# Altium PCB LedDispBoard.PcbDoc (part 2 of 2)
Units mm, origin at the board's own origin, x right, y up, seen from the top; angles counter-clockwise.
Board outline 196.96 x 52.93 mm, 2 copper layers (Top Layer, Bottom Layer); 169 components, 103 nets, 472 pads, 117 vias.
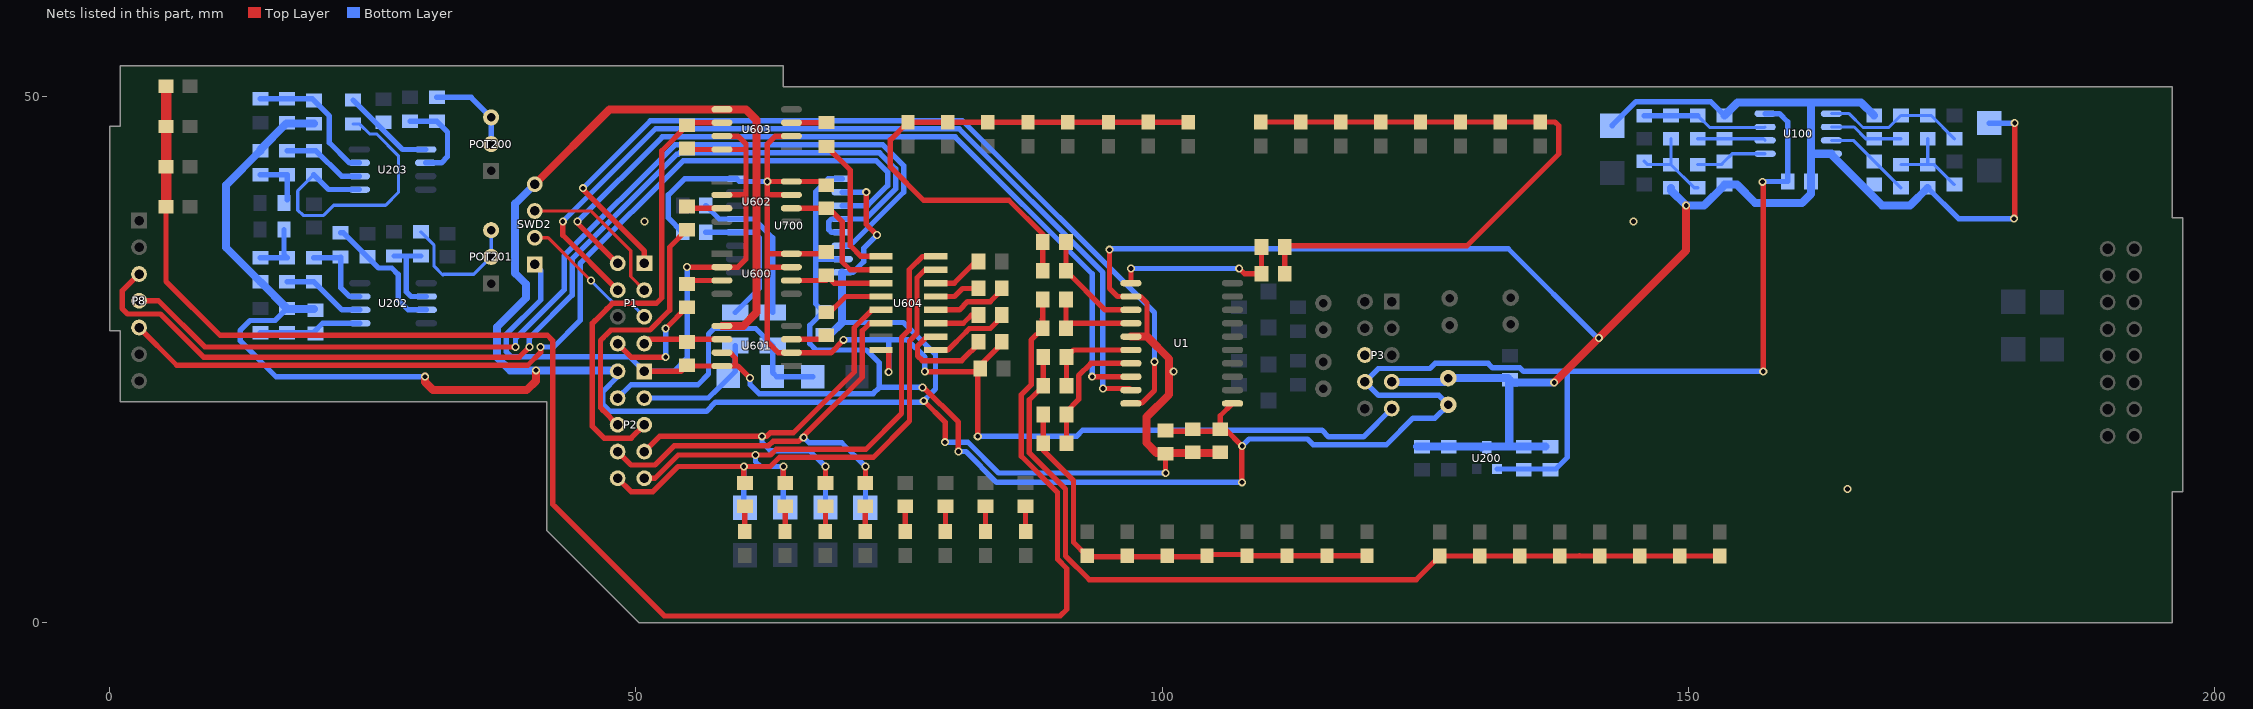
[diagram p2: the nets of this part, all layers, seen from the top]

## Via types
v1: diameter 0.762, hole 0.457, Top Layer to Bottom Layer, tented both sides, 106 vias
v2: diameter 0.8, hole 0.4, Top Layer to Bottom Layer, tented both sides, 9 vias
v3: diameter 0.762, hole 0.457, Top Layer to Bottom Layer, 2 vias

## Nets (pads, with @x,y where several pads share a name; then routed paths per layer and width w, separated by ;. In a path a pad name is that pad's centre, name@x,y a point inside that pad or via, vN(x,y) a via of type N, cw(c..) or ccw(c..) an arc to the next point about the centre after c; other vN are vias at no path point) (continued)
GNDMCU: C1.2 C2.2 C3.1 C100.1 C101.1 C104.2 C200.1 C201.2 C202.2 C203.1 C204.2 C205.2 C700.1 D100.1 D101.1 E1.2 JP1.1 P2.2 P3.7 R102.1 R103.1 R104.1 R105.1 R201.2 R203.2 R210.2 R212.2 SWD2.4 U1.12 U1.15 U100.4 U200.3 U601.5 U603.5 U700.2 U700.8 | length 465.4
  Top Layer w0.508: v1(71.882,40.894) 71.882,37.846 v1(72.898,36.83) ; v1(77.343,21.082) 79.375,19.05 v1(79.375,17.145) ; v1(94.996,35.433) 94.996,31.75 95.758,30.988 U1.12@97.028,30.988 97.917,30.988 98.552,30.353 98.552,27.178 ; C1.2@100.305,16.053 100.305,14.249 v1(100.33,14.224) ; v1(180.924,38.379) 180.99,38.445 v1(180.99,47.462)
  Top Layer w0.762: v1(29.972,23.368) 29.972,22.86 30.734,22.098 39.624,22.098 40.499,22.973 v1(40.499,23.977) ; SWD2.4@40.386,41.656 47.498,48.768 U603.5@58.17,48.768 60.452,48.768 61.468,47.752 61.468,29.464 60.198,28.194 U601.5@58.17,28.194 ; U1.15@97.028,27.178 98.552,27.178 100.66,25.07 100.66,21.692 98.501,19.533 98.501,17.094 99.466,16.129 C2.2@105.512,16.129 ; v1(137.236,22.809) 149.776,35.349 v1(149.776,39.624)
  Bottom Layer w0.508: R212.2@16.866,29.845 15.723,28.702 13.353,28.702 12.395,27.744 12.395,26.797 15.824,23.368 v1(29.972,23.368) ; P2.2@48.26,23.876 48.26,23.368 46.863,21.971 46.863,20.748 47.533,20.078 56.685,20.078 57.562,20.955 v1@77.343,20.955 ; 69.596,28.524 75.425,28.524 78.461,25.489 78.461,22.2 v1@77.584,21.323 ; U700.8@69.596,33.274 70.612,33.274 71.628,34.29 71.628,35.56 v1(72.898,36.83) ; U700.2@69.596,40.894 v1(71.882,40.894) ; v1(79.375,17.145) 81.534,17.145 84.455,14.224 v1(100.33,14.224) ; v1(94.996,35.433) 95.091,35.528 132.874,35.528 141.351,27.051 v1(141.478,27.051) ; D101.1@142.748,47.208 142.748,47.244 145.008,49.505 152.095,49.505 R105.1@153.416,48.184 ; C100.1@172.72,41.318 175.659,38.379 v1(180.924,38.379) ; D100.1@178.562,47.462 v1(180.99,47.462)
  Bottom Layer w0.762: C205.2@19.397,29.802 16.909,29.802 R212.2@16.866,29.845 R203.2@14.326,32.385 14.317,32.385 11.074,35.627 11.074,41.589 14.317,44.831 R201.2@14.326,44.831 14.326,44.958 16.781,47.414 C204.2@19.406,47.414 ; SWD2.4@40.386,41.656 38.532,39.802 38.532,33.198 39.573,32.156 39.573,30.866 36.779,28.072 36.779,25.222 38.025,23.977 38.331,23.977 v1(40.499,23.977) 47.853,23.977 48.006,24.13 48.159,23.977 P2.2@48.26,23.876 ; C700.1@68.42,27.348 69.596,28.524 U700.8@69.596,33.274 ; P3.7@121.802,22.885 126.822,22.885 E1.2@127.178,23.241 132.842,23.241 JP1.1@132.969,23.114 ; C203.1@124.206,16.721 130.353,16.721 ; 130.353,16.637 130.353,16.721 ; C201.2@136.398,16.721 132.842,16.721 ; v1(137.236,22.809) 133.274,22.809 JP1.1@133.02,23.063 JP1.1@132.969,23.114 ; C101.1@148.336,41.318 148.336,41.064 v1(149.776,39.624) 151.48,39.624 153.416,41.56 R103.1@153.416,41.622 154.593,41.622 156.337,39.878 160.782,39.878 161.628,40.724 C104.2@161.628,41.91 161.628,44.704 ; R105.1@153.416,48.184 154.661,49.428 161.417,49.428 ; U100.4@163.576,44.45 168.402,39.624 171.026,39.624 C100.1@172.72,41.318 ; U100.4@163.576,44.55 161.782,44.55 161.628,44.704 ; R104.1@167.64,48.184 166.395,49.428 161.417,49.428 ; 130.353,16.721 132.842,16.721 ; 132.842,16.721 132.969,16.848 JP1.1@132.969,23.114 ; 161.417,49.428 161.628,49.217 161.628,44.704
  other v1: 165.1,12.7 101.092,23.876 50.8,38.1 144.78,38.1
GRID1: R13.1 R14.1 U1.17 | length 12.4
  Top Layer w0.5: R14.1@90.907,17.043 R13.1@90.907,19.775 90.907,20.041 92.061,21.195 92.061,23.481 93.218,24.638 U1.17@97.028,24.638
GRID2: R15.1 R16.1 U1.16 | length 9.1
  Top Layer w0.5: R16.1@90.907,22.507 R15.1@90.907,25.238 91.576,25.908 U1.16@97.028,25.908
GRID3: R17.1 R18.1 U1.14 | length 8.4
  Top Layer w0.5: R17.1@90.856,27.97 R18.1@90.856,30.701 ; R17.1@91.334,28.448 U1.14@97.028,28.448
GRID4: R9.1 R10.1 U1.13 | length 10.4
  Top Layer w0.5: R9.1@90.856,36.164 R10.1@90.856,33.433 94.571,29.718 U1.13@97.028,29.718
GRID5: R11.1 R12.1 U1.11 | length 16.6
  Top Layer w0.5: U1.11@97.028,32.258 v1(97.028,33.655) ; v1(107.315,33.655) 107.823,33.147 R11.1@109.433,33.147 R12.1@109.433,35.687
  Bottom Layer w0.5: v1(97.028,33.655) v1(107.315,33.655)
LED_CS: P1.1 U1.20 | length 83.9
  Top Layer w0.508: v1(44.958,41.275) 44.958,41.148 50.803,35.303 P1.1@50.803,34.138 ; U1.20@97.333,20.879 98.069,20.879 99.263,22.073 v1(99.263,24.79)
  Bottom Layer w0.508: v1(44.958,41.275) 51.368,47.685 81.027,47.685 99.263,29.449 v1(99.263,24.79)
LED_DAT: P1.2 U1.18 | length 76.6
  Top Layer w0.508: v1(44.45,38.1) 44.45,37.95 P1.2@48.263,34.138 ; v1(93.345,23.368) U1.18@97.028,23.368
  Bottom Layer w0.508: v1(44.45,38.1) 52.511,46.161 80.331,46.161 93.345,33.147 v1(93.345,23.368)
LED_SCK: P1.4 U1.19 | length 82.9
  Top Layer w0.508: v1@43.193,38.1 v1(43.053,38.1) 43.053,36.807 P1.4@48.263,31.598 ; v1(94.361,22.25) 96.876,22.25 U1.19@97.028,22.098
  Bottom Layer w0.508: v1@43.237,38.284 51.876,46.923 80.712,46.923 94.361,33.274 v1(94.361,22.25)
MCU_RXD_A: P1.7 R602.1 U601.6 | length 7.9
  Top Layer w0.508: P1.7@51.156,26.518 P1.7@50.803,26.518 51.209,26.924 U601.6@58.17,26.924
MCU_RXD_B: P2.5 R603.1 U603.6 | length 46
  Top Layer w0.508: 46.538,17.978 46.097,18.419 ; 47.244,29.818 46.097,28.671 ; P2.5@50.8,18.796 49.542,17.538 46.978,17.538 46.097,18.419 ; R603.1@54.864,47.244 52.451,44.831 52.451,30.861 51.93,30.34 47.766,30.34 46.097,28.671 ; R603.1@55.118,47.498 U603.6@58.17,47.498 ; 46.097,18.419 45.865,18.651 45.865,28.439 46.097,28.671
MCU_TXD_A: P1.8 R600.1 | length 10.7
  Top Layer w0.508: P1.8@48.263,26.518 49.548,25.232 v3(52.832,25.232) ; v3(52.832,27.94) R600.1@54.864,29.972
  Bottom Layer w0.508: v3(52.832,25.232) v3(52.832,27.94)
MCU_TXD_B: P2.6 R601.1 | length 25.3
  Top Layer w0.508: 47.244,27.432 46.882,27.07 ; P2.6@48.26,18.796 46.863,20.193 46.627,20.429 46.627,26.815 46.882,27.07 ; R601.1@54.864,37.338 53.213,35.687 53.213,29.689 51.324,27.8 47.612,27.8 46.882,27.07
NetC100_2: C100.2 C102.1 R100.1 R108.2 | length 8.3
  Bottom Layer w0.305: C102.1@170.18,43.518 C100.2@172.72,43.518 ; R108.2@172.72,45.984 C100.2@172.72,43.518 ; R100.1@175.26,41.622 173.364,43.518 C100.2@172.72,43.518
NetC101_2: C101.2 C103.1 R101.1 R109.2 | length 8.6
  Bottom Layer w0.305: R101.1@145.796,43.832 146.11,43.518 C101.2@148.336,43.518 ; R109.2@148.336,45.984 C101.2@148.336,43.518 ; C103.1@150.876,41.318 150.536,41.318 C101.2@148.336,43.518
NetC102_2: C102.2 R102.2 U100.3 | length 8.5
  Bottom Layer w0.305: U100.3@163.576,45.82 165.642,45.82 R102.2@167.64,43.822 170.144,41.318 C102.2@170.18,41.318
NetC103_2: C103.2 R103.2 U100.5 | length 6.8
  Bottom Layer w0.305: C103.2@150.876,43.518 153.112,43.518 R103.2@153.416,43.822 154.144,44.55 U100.5@157.276,44.55
NetC204_1: C204.1 R204.2 R210.1 U203.3 | length 13.4
  Bottom Layer w0.508: R204.2@14.326,49.784 R210.1@16.866,49.784 19.235,49.784 C204.1@19.406,49.614 20.879,48.141 20.879,45.593 22.784,43.688 U203.3@23.724,43.688
NetC205_1: C205.1 R206.2 R212.1 U202.5 | length 9.8
  Bottom Layer w0.508: R206.2@14.326,27.559 R212.1@16.866,27.559 19.354,27.559 19.397,27.602 20.243,28.448 U202.5@23.774,28.448
NetC206_2: C206.2 R216.2 U203.5 | length 8.8
  Bottom Layer w0.508: R216.2@23.128,49.657 27.827,44.958 U203.5@30.024,44.958
NetC207_2: C207.2 R217.2 U202.3 | length 12.6
  Bottom Layer w0.508: R217.2@21.946,37.033 22.209,37.033 C207.2@24.486,34.757 25.544,33.698 26.805,33.698 27.407,33.096 27.407,30.683 28.372,29.718 U202.3@30.074,29.718
NetC600_1: C600.1 U604.1 | length 7.8
  Top Layer w0.508: U604.1@78.486,25.908 79.654,25.908 81.384,27.638 81.384,27.656 81.682,27.953 83.663,27.953 C600.1@84.92,29.21
NetC600_2: C600.2 U604.3 | length 4.5
  Top Layer w0.508: U604.3@78.486,28.448 81.099,28.448 81.861,29.21 C600.2@82.72,29.21
NetC601_1: C601.1 U604.4 | length 7.3
  Top Layer w0.508: U604.4@78.486,29.718 80.736,29.718 81.511,30.493 83.663,30.493 C601.1@84.92,31.75
NetC601_2: C601.2 U604.5 | length 4.5
  Top Layer w0.508: U604.5@78.486,30.988 80.264,30.988 81.026,31.75 C601.2@82.72,31.75
NetC602_2: C602.2 U604.6 | length 5.1
  Top Layer w0.508: U604.6@78.486,32.258 80.239,32.258 82.271,34.29 C602.2@82.72,34.29
NetC603_1: C603.1 U604.2 | length 9.9
  Top Layer w0.508: U604.2@78.486,27.178 77.724,27.178 77.638,27.178 76.755,26.295 76.755,26.209 76.755,25.353 77.216,24.892 80.942,24.892 C603.1@82.72,26.67
NetL700_1: L700.1 R700.1 U700.13 | length 14.7
  Bottom Layer w0.5: R700.1@56.642,39.624 57.912,38.354 U700.13@59.563,38.354 61.214,38.354 62.992,36.576 L700.1@62.992,29.464
NetL701_1: L701.1 R701.1 U700.12 | length 13.4
  Bottom Layer w0.5: R701.1@56.642,37.084 U700.12@59.563,37.084 61.222,37.084 61.722,36.584 61.722,31.75 L701.1@59.436,29.464
NetLED1_1: LED1.1 R1.1 | length 2.4
  Top Layer w0.5: LED1.1@75.59,8.661 R1.1@75.59,11.074
NetLED2_1: LED2.1 R2.1 | length 2.4
  Top Layer w0.5: LED2.1@79.4,8.661 R2.1@79.4,11.074
NetLED3_1: LED3.1 R3.1 | length 2.4
  Top Layer w0.5: LED3.1@83.21,8.661 R3.1@83.21,11.074
NetLED4_1: LED4.1 R4.1 | length 2.4
  Top Layer w0.5: LED4.1@87.02,8.661 R4.1@87.02,11.074
NetLED5_1: LED5.1 R5.1 | length 2.4
  Top Layer w0.5: LED5.1@71.78,8.661 R5.1@71.78,11.074
NetLED6_1: LED6.1 R6.1 | length 2.4
  Top Layer w0.5: LED6.1@67.97,8.661 68.007,8.698 R6.1@68.007,11.074
NetLED7_1: LED7.1 R7.1 | length 2.4
  Top Layer w0.5: LED7.1@64.16,8.661 64.179,8.68 R7.1@64.179,11.074
NetLED8_1: LED8.1 R8.1 | length 2.4
  Top Layer w0.5: LED8.1@60.35,8.661 R8.1@60.35,11.074
NetLED9_2: LED9.2 LED10.2 LED11.2 LED12.2 LED13.2 LED14.2 LED15.2 LED16.2 R9.2 R10.2 | length 52.8
  Top Layer w0.5: 74.168,44.45 74.168,44.729 ; R10.2@88.656,33.433 R9.2@88.656,36.164 88.656,36.896 85.42,40.132 77.322,40.132 74.168,43.286 74.168,44.729 ; 92.456,47.549 92.126,47.549 ; LED9.2@102.489,47.549 LED11.2@94.894,47.549 92.126,47.549 ; 74.168,44.729 74.168,45.872 LED16.2@75.844,47.549 LED15.2@79.629,47.549 LED14.2@83.439,47.549 LED13.2@87.249,47.549 LED12.2@91.034,47.549 92.126,47.549
NetLED17_2: LED17.2 LED18.2 LED19.2 LED20.2 LED21.2 LED22.2 LED23.2 LED24.2 R11.2 R12.2 | length 63.2
  Top Layer w0.5: LED24.2@109.372,47.574 LED23.2@113.164,47.574 LED22.2@116.956,47.574 LED21.2@120.748,47.574 LED20.2@124.54,47.574 LED19.2@128.332,47.574 LED18.2@132.124,47.574 LED17.2@135.915,47.574 137.312,47.574 137.668,47.219 137.668,44.526 128.956,35.814 R12.2@111.76,35.814 ; R11.2@111.633,33.147 R12.2@111.633,35.687
NetLED25_2: LED25.2 LED26.2 LED27.2 LED28.2 LED29.2 LED30.2 LED31.2 LED32.2 R13.2 R14.2 | length 41.6
  Top Layer w0.5: R14.2@88.681,16.399 91.567,13.513 91.567,7.645 LED32.2@92.862,6.35 92.862,6.255 104.165,6.255 LED29.2@104.26,6.35 104.26,6.473 107.936,6.473 LED28.2@108.059,6.35 LED27.2@111.858,6.35 LED26.2@115.657,6.35 LED25.2@119.456,6.35 ; R14.2@88.707,17.043 R13.2@88.707,19.775 R13.2@88.707,19.963
NetLED33_2: LED33.2 LED34.2 LED35.2 LED36.2 LED37.2 LED38.2 LED39.2 LED40.2 R15.2 R16.2 | length 84.9
  Top Layer w0.5: R15.2@88.707,25.238 R16.2@88.707,22.507 87.376,21.176 87.376,16.129 90.805,12.7 90.805,6.35 93.066,4.089 124.13,4.089 LED40.2@126.365,6.325 LED39.2@130.164,6.325 LED38.2@133.963,6.325 LED37.2@137.762,6.325 139.7,6.325 ; 139.649,6.375 139.7,6.325 ; LED33.2@152.959,6.325 LED34.2@149.16,6.325 LED35.2@145.361,6.325 LED36.2@141.561,6.325 139.7,6.325
NetLED41_2: LED41.2 LED42.2 LED43.2 LED44.2 R17.2 R18.2 | length 158.8
  Top Layer w0.5: 88.595,28.829 88.656,28.768 ; R17.2@88.656,27.97 88.656,28.768 ; R18.2@88.656,30.701 88.656,28.768
  Top Layer w0.508: LED41.2@5.359,39.522 5.359,32.431 10.481,27.309 41.588,27.309 42.087,26.81 42.087,11.253 42.319,11.021 52.705,0.635 90.297,0.635 90.932,1.27 90.932,5.151 90.047,6.036 90.047,12.386 86.618,15.815 86.618,21.666 87.549,22.597 87.549,26.862 R17.2@88.656,27.97
  Top Layer w1: LED41.2@5.359,39.522 LED42.2@5.359,43.332 LED43.2@5.359,47.142 LED44.2@5.359,50.952
NetPOT200_2: POT200.2 POT200.3 R220.2 | length 8.5
  Bottom Layer w0.508: R220.2@31.09,49.911 34.341,49.911 POT200.3@36.246,48.006 POT200.2@36.246,45.466
NetPOT201_2: POT201.2 POT201.3 R221.2 | length 12.8
  Bottom Layer w0.305: R221.2@29.566,37.127 30.802,35.89 30.802,33.891 31.674,33.02 31.75,33.096 34.595,33.096 POT201.2@36.246,34.747 POT201.3@36.246,37.287
NetR104_2: R104.2 R106.2 U100.2 | length 7.1
  Bottom Layer w0.305: U100.2@163.576,47.09 165.733,47.09 166.84,45.984 R106.2@170.18,45.984
NetR105_2: R105.2 R107.2 U100.6 | length 6.5
  Bottom Layer w0.305: R107.2@150.876,45.984 R105.2@153.416,45.984 157.113,45.984 U100.6@157.276,45.82
NetR106_1: R106.1 R108.1 R110.2 U100.1 | length 13.6
  Bottom Layer w0.305: U100.1@163.576,48.36 165.254,48.36 166.574,47.04 169.036,47.04 R106.1@170.18,48.184 R108.1@172.72,48.184 173.06,48.184 R110.2@175.26,45.984
NetR107_1: R107.1 R109.1 R111.2 U100.7 | length 12
  Bottom Layer w0.305: R107.1@150.866,48.174 152,47.04 157.226,47.04 U100.7@157.276,47.09
  Bottom Layer w0.508: R111.2@145.796,48.174 R107.1@150.866,48.174
NetR200_1: R200.1 R201.1 R205.1 | length 4.9
  Bottom Layer w0.508: R201.1@14.326,42.545 R205.1@16.866,42.545 R200.1@16.866,40.175
NetR202_1: R202.1 R203.1 R207.1 | length 5.3
  Bottom Layer w0.508: R203.1@14.326,34.671 R207.1@16.866,34.671 16.569,34.968 R202.1@16.569,37.338
NetR205_2: R205.2 R211.1 U203.2 | length 7.9
  Bottom Layer w0.508: R205.2@16.866,44.831 R211.1@19.406,44.831 19.609,44.831 22.022,42.418 U203.2@23.724,42.418
NetR207_2: R207.2 R213.1 U202.6 | length 8
  Bottom Layer w0.508: R207.2@16.866,32.385 R213.1@19.406,32.385 22.073,29.718 U202.6@23.774,29.718
NetR211_2: R211.2 R216.1 U203.1 | length 28.6
  Bottom Layer w0.305: R211.2@19.406,42.545 17.882,41.021 17.882,39.192 18.379,38.694 20.324,38.694 21.279,39.649 26.213,39.649 27.432,40.869 27.432,44.353 25.354,46.431 24.689,46.431 23.749,47.371 R216.1@23.128,47.371
  Bottom Layer w0.508: R211.2@19.406,42.545 20.803,41.148 U203.1@23.724,41.148
NetR213_2: R213.2 R217.1 U202.7 | length 7.7
  Bottom Layer w0.508: R213.2@19.406,34.671 21.869,34.671 R217.1@21.946,34.747 21.946,31.826 22.784,30.988 U202.7@23.774,30.988
NetR218_2: R218.2 R220.1 U203.6 | length 8.6
  Bottom Layer w0.508: R218.2@28.55,47.625 R220.1@31.09,47.625 32.106,46.609 32.106,44.272 31.521,43.688 U203.6@30.024,43.688
NetR219_2: R219.2 R221.1 U202.2 | length 8
  Bottom Layer w0.508: R219.2@27.026,34.841 28.169,34.841 ; R221.1@29.566,34.841 28.169,34.841 ; U202.2@30.074,30.988 28.626,30.988 28.169,31.445 28.169,34.841
NetR600_2: R600.2 U600.3 | length 3.3
  Top Layer w0.508: R600.2@54.864,32.426 54.95,32.512 U600.3@58.166,32.512
NetR601_2: R601.2 U602.3 | length 3.1
  Top Layer w0.508: R601.2@55.032,39.37 U602.3@58.166,39.37
NetR604_1: R604.1 U600.6 U604.11 | length 9.2
  Top Layer w0.508: U600.6@64.766,32.512 68.072,32.512 R604.1@68.326,32.766 ; R604.1@68.072,33.02 R604.1@68.326,32.766 ; U604.11@73.286,32.258 68.834,32.258 R604.1@68.326,32.766
NetR605_1: R605.1 U602.6 U604.10 | length 13.2
  Top Layer w0.508: U602.6@64.766,39.37 R605.1@68.072,39.37 68.326,39.37 69.596,38.1 69.596,34.29 70.358,33.528 U604.10@73.286,33.528
NetR606_1: R606.1 U601.3 | length 3.6
  Top Layer w0.508: U601.3@64.77,26.924 R606.1@68.326,26.924
NetR606_2: R606.2 U604.12 | length 6
  Top Layer w0.508: R606.2@68.072,29.124 69.936,30.988 U604.12@73.286,30.988
NetR607_1: R607.1 U603.3 | length 3.3
  Top Layer w0.508: U603.3@64.77,47.498 R607.1@68.072,47.498
NetR607_2: R607.2 U604.9 | length 13.8
  Top Layer w0.508: R607.2@68.072,45.298 70.358,43.012 70.358,35.814 71.374,34.798 U604.9@73.286,34.798
RS232_RX_A: D601.2 P2.7 R6.2 U604.13 | length 43.3
  Top Layer w0.508: P2.7@50.8,16.256 52.248,17.704 53.518,17.704 v1(61.976,17.704) 62.411,17.704 62.741,18.034 64.948,18.034 70.739,23.825 70.739,28.042 72.415,29.718 U604.13@73.286,29.718 ; R6.2@68.007,13.274 v1@68.007,14.605
  Bottom Layer w0.508: v1(61.976,17.704) 61.976,17.12 62.763,16.332 66.508,16.332 v1(68.007,14.834) D601.2@68.007,10.948
RS232_RX_B: D603.2 P2.9 R7.2 U604.8 | length 52.6
  Top Layer w0.5: P2.9@50.8,13.716 51.816,13.716 54.026,15.926 v1(61.366,15.926) 62.782,15.926 63.329,16.473 71.845,16.473 75.235,19.863 75.235,27.076 75.954,27.796 75.954,33.536 77.216,34.798 U604.8@78.486,34.798 ; v1@64.008,14.605 64.008,13.445 R7.2@64.179,13.274
  Bottom Layer w0.5: v1(61.366,15.926) 61.366,15.291 61.824,14.834 v1(64.008,14.834) D603.2@64.008,11.1
RS232_TX_A: D600.2 P2.8 R5.2 U604.14 | length 45.9
  Top Layer w0.5: R5.2@71.78,13.274 71.755,13.3 71.806,13.351 v1@71.806,14.605
  Top Layer w0.508: P2.8@48.26,16.256 49.53,14.986 51.816,14.986 53.645,16.815 62.599,16.815 63.015,17.231 65.44,17.231 65.811,17.602 v1(65.938,17.602) 65.938,17.729 71.501,23.292 71.501,27.726 72.223,28.448 U604.14@73.286,28.448
  Bottom Layer w0.5: v1(65.938,17.602) 66.45,17.09 69.549,17.09 v1(71.806,14.834) ; D600.2@71.78,10.911 71.755,10.937 71.806,10.988 v1@71.806,14.605
RS232_TX_B: D602.2 P2.10 R8.2 U604.7 | length 52.6
  Top Layer w0.5: P2.10@48.26,13.716 49.53,12.446 51.612,12.446 54,14.834 v1(60.249,14.834) ; R8.2@60.35,13.274 60.325,13.3 60.35,13.325 60.249,13.427 v1(60.249,14.834) ; U604.7@78.486,33.528 77.47,33.528 76.708,32.766 76.708,27.483 75.997,26.772 75.997,19.152 72.564,15.719 63.641,15.719 62.756,14.834 v1(60.249,14.834)
  Bottom Layer w0.5: v1(60.249,14.834) 60.249,11.064 60.35,10.962 D602.2@60.325,10.937
RS485_A: D700.1 L701.2 P2.3 | length 12.1
  Bottom Layer w0.5: P2.3@50.8,21.336 56.871,21.336 57.752,22.217 57.777,22.217 59.436,23.876 L701.2@59.436,26.335
RS485_B: D700.2 D701.1 L700.2 P2.4 | length 26.9
  Bottom Layer w0.5: P2.4@48.26,21.336 49.53,22.606 55.88,22.606 56.896,23.622 56.896,27.432 57.404,27.94 61.387,27.94 L700.2@62.992,26.335 62.992,23.758 63.382,23.368 D701.1@66.802,23.368
RS485_CE: P8.3 U700.4 U700.5 | length 102.2
  Top Layer w0.508: P8.3@2.797,33.122 1.194,31.519 1.194,29.845 1.715,29.324 4.829,29.324 8.93,25.222 38.913,25.222 v1(39.878,26.187)
  Bottom Layer w0.508: v1(39.878,26.187) 39.878,27.051 40.132,27.305 43.942,31.115 43.942,34.569 53.865,44.493 54.007,44.493 54.151,44.637 73.157,44.637 74.676,43.118 74.676,41.21 71.82,38.354 U700.4@69.596,38.354 68.58,38.354 68.326,38.1 68.326,37.338 68.58,37.084 U700.5@69.596,37.084
RS485_RXD: P8.5 U700.3 | length 90.9
  Top Layer w0.508: P8.5@2.797,28.042 6.378,24.46 39.726,24.46 40.945,25.679 v1(40.945,26.187)
  Bottom Layer w0.508: v1(40.945,26.187) 42.189,26.187 44.704,28.702 44.704,30.799 44.704,34.112 54.467,43.875 72.842,43.875 73.914,42.803 73.914,41.525 72.013,39.624 U700.3@69.596,39.624
RS485_TXD: P8.4 U700.6 | length 96.1
  Top Layer w0.508: P8.4@2.797,30.582 4.648,30.582 9.042,26.187 v1(38.557,26.187)
  Bottom Layer w0.508: v1(38.557,26.187) 38.557,27 43.18,31.623 43.18,34.885 53.694,45.399 73.473,45.399 75.438,43.434 75.438,40.894 70.358,35.814 U700.6@69.596,35.814
SWD_CLK: P1.3 SWD2.3 | length 15
  Top Layer w0.305: SWD2.3@40.386,39.116 45.72,39.116 49.508,35.328 49.508,32.893 P1.3@50.803,31.598
SWD_DIO: P1.5 SWD2.2 | length 13.5
  Top Layer w0.305: SWD2.2@40.386,36.576 41.656,36.576 v1(45.72,32.512)
  Bottom Layer w0.305: v1(45.72,32.512) 47.106,31.126 47.106,31.119 47.784,30.441 47.791,30.441 48.006,30.226 49.634,30.226 P1.5@50.803,29.058
VCC_COMM: C603.2 C604.2 P3.9 R604.2 R605.2 R701.2 U600.7 U600.8 U601.2 U602.7 U602.8 U603.2 U604.16 U700.16 | length 131.1
  Top Layer w0.508: U600.7@64.766,33.782 62.484,33.782 ; U602.7@64.766,40.64 62.484,40.64 ; U603.2@64.77,46.228 63.246,46.228 62.484,45.466 v1(62.484,41.91) ; R605.2@67.986,41.91 U602.8@64.766,41.91 v1(62.484,41.91) ; R604.2@68.58,35.22 68.412,35.052 U600.8@64.766,35.052 62.484,35.052 ; v1(69.723,26.873) 69.723,26.838 68.514,25.629 64.795,25.629 U601.2@64.77,25.654 63.5,25.654 62.484,26.67 62.484,33.782 ; U604.16@73.286,25.908 73.787,25.908 74.016,25.679 v1(74.016,23.825) ; v1(77.445,23.851) 82.611,23.851 C604.2@82.712,23.952 ; v1(82.474,17.704) C604.2@82.474,23.561 ; C604.2@82.525,23.765 C604.2@82.55,23.79 ; C604.2@82.89,24.13 82.89,24.64 C603.2@84.92,26.67 ; 62.484,33.782 62.484,35.052 ; 62.484,35.052 62.484,40.64 ; 62.484,40.64 v1(62.484,41.91)
  Bottom Layer w0.508: R701.2@54.442,37.084 53.086,38.44 53.086,40.64 54.61,42.164 U700.16@59.563,42.164 59.817,41.91 v1(62.484,41.91) ; v1(69.723,26.873) 75.819,26.873 77.445,25.248 v1(77.445,23.851) ; v1(74.016,23.825) 74.016,26.797 ; v1(82.474,17.704) 91.864,17.704 92.449,18.288 115.174,18.288 115.809,17.653 119.11,17.653 P3.9@121.802,20.345
VCCMCU_3.3: C1.1 C2.1 C3.2 C104.1 C200.2 C201.1 C700.2 E1.1 P2.1 P3.8 R602.2 R603.2 SWD2.1 U1.1 U100.8 U200.1 U600.2 U601.7 U601.8 U602.2 U603.7 U603.8 U700.1 U700.7 | length 288.3
  Top Layer w0.508: P2.1@50.8,23.876 54.27,23.876 R602.2@54.864,24.47 54.95,24.384 U601.8@58.17,24.384 59.182,24.384 ; v1(54.864,33.782) U600.2@58.166,33.782 59.69,33.782 60.452,34.544 60.452,40.64 ; R603.2@54.864,45.044 54.95,44.958 U603.8@58.17,44.958 60.452,44.958 ; U602.2@58.166,40.64 60.452,40.64 ; U601.7@58.17,25.654 58.928,25.654 59.436,25.146 59.436,24.638 59.182,24.384 ; U603.7@58.17,46.228 59.69,46.228 60.452,45.466 60.452,44.958 ; v1(60.833,23.241) 59.69,24.384 59.182,24.384 ; v1(77.216,22.352) 77.33,22.352 80.632,19.05 80.632,16.269 v1(80.645,16.256) ; C1.1@100.828,18.202 C2.1@105.512,18.202 ; U1.1@106.68,20.828 105.512,19.66 C2.1@105.512,18.38 106.004,18.38 v1(107.594,16.789) 107.569,16.764 v1(107.569,13.335) ; v1(157.023,41.885) 157.099,41.808 v1(157.099,23.876) ; 60.452,40.64 60.452,44.958
  Bottom Layer w0.508: SWD2.1@40.386,34.036 40.97,33.452 40.97,30.683 37.668,27.381 37.668,25.756 38.164,25.26 49.416,25.26 P2.1@50.8,23.876 53.594,23.876 54.864,25.146 v1(54.864,33.782) ; v1(60.833,23.241) 60.833,22.618 61.691,21.76 72.535,21.76 73.127,22.352 ; U700.7@69.596,34.544 67.081,34.544 ; U700.1@69.596,42.164 68.275,42.164 67.081,40.97 67.081,34.544 ; v1(77.216,22.352) 73.127,22.352 ; v1(80.645,16.256) 81.345,16.256 84.266,13.335 v1(107.569,13.335) ; v1(107.594,16.789) 108.255,17.45 113.803,17.45 114.362,16.891 121.285,16.891 123.825,19.431 125.908,19.431 E1.1@127.178,20.701 126.275,21.603 120.544,21.603 P3.8@119.262,22.885 120.532,24.155 125.425,24.155 125.908,24.638 130.962,24.638 131.394,24.206 133.992,24.206 134.322,23.876 v1(157.099,23.876) ; U200.1@131.801,14.605 137.389,14.605 138.481,15.697 138.481,23.749 ; v1(157.023,41.885) 157.048,41.91 C104.1@159.428,41.91 159.428,47.582 158.65,48.36 U100.8@157.276,48.36 ; 67.081,34.544 67.081,30.285 C700.2@67.818,29.548 66.528,28.258 66.528,26.498 67.118,25.908 71.907,25.908 73.127,24.689 73.127,22.352
VCCMCU_5V: P3.6
pads on no net: P1.6 P4.1 P4.2 P4.3 P4.4 P4.5 P4.6 P4.7 P4.8 P4.13 P4.14 P4.15 P4.16 R1.2 R2.2 R3.2 R4.2 U1.10 U600.1 U600.4 U601.1 U601.4 U602.1 U602.4 U603.1 U603.4 U700.10 U700.11 U700.14
copper on no net:
  other v2: 194.627,2.946 194.386,10.058 194.691,15.545 194.894,21.488 194.894,28.854 130.785,34.366 128.118,34.392 123.063,34.62 134.341,36.449

## Polygon pours and split planes (outlines as drawn)
GND_COMM on Bottom Layer "GND_COMM_L02_P014" (hatched 90Degree grid 0.508 track 0.254, remove dead copper, pour order 14): 60.96,50.8 60.96,20.32 45.72,20.32 45.72,0 88.9,0 88.9,37.592 88.9,38.1 76.2,38.1 76.2,50.8
GNDMCU on Bottom Layer "GNDMCU_L02_P012" (hatched 90Degree grid 0.508 track 0.254, remove dead copper, pour order 12): 198.12,0 198.12,15.24 177.8,15.24 177.8,40.64 198.12,40.64 198.12,50.8 40.64,50.8 40.64,30.48 45.72,30.48 45.72,35.56 53.34,35.56 53.34,22.86 60.96,22.86 60.96,48.26 88.9,48.26 88.9,0
AGND on Bottom Layer "AGND_L02_P000" (hatched 90Degree grid 0.508 track 0.254, remove dead copper, pour order 0): 12.7,53.34 12.7,25.4 38.1,25.4 38.1,53.34 12.7,53.34
GNDMCU on Top Layer "GNDMCU_L01_P010" (hatched 90Degree grid 0.508 track 0.254, remove dead copper, pour order 10): 198.12,0 198.12,15.24 177.8,15.24 177.8,40.64 198.12,40.64 198.12,50.8 40.64,50.8 40.64,30.48 45.72,30.48 45.72,35.56 53.34,35.56 53.34,22.86 60.452,22.86 60.452,48.26 88.9,48.26 88.9,0
GND_COMM on Top Layer "GND_COMM_L01_P006" (hatched 90Degree grid 0.508 track 0.254, remove dead copper, pour order 6): 60.96,50.8 60.96,20.32 45.72,20.32 45.72,0 88.9,0 88.9,37.592 88.9,38.1 76.2,38.1 76.2,50.8
AGND on Top Layer "AGND_L01_P002" (hatched 90Degree grid 0.508 track 0.254, remove dead copper, pour order 2): 12.7,53.34 12.7,25.4 38.1,25.4 38.1,53.34 12.7,53.34

## Keep-outs
Keep-Out Layer:
  lines w0.1: 195.91,0.229 195.91,12.429 ; 195.91,38.429 195.91,50.629 ; 0,27.754 0,47.154 1,47.154 1,52.927 64.008,52.927 64.008,50.927 195.961,50.927 195.961,38.454 196.961,38.454 196.961,12.454 195.961,12.454 195.961,0 50.292,0 41.529,8.763 41.529,21.006 1,21.006 1,27.754 0,27.754

## Silkscreen, mask and mechanical layers (free items; w line width, h text height)
Top Overlay:
  lines w0.1: 0.257,38.202 2.797,38.202 2.797,41.478 ; 44.402,23.978 48.263,23.978 ; 44.402,34.138 48.263,34.138 ; 48.263,27.432 48.263,23.978 ; 48.263,37.592 48.263,34.138 ; 50.803,27.254 50.803,23.978 48.263,23.978 ; 50.803,37.414 50.803,34.138 48.263,34.138 ; 190.019,17.698 194.591,17.698 ; 190.019,35.478 194.591,35.478
  lines w0.127: 5.715,39.522 7.239,39.522 ; 5.715,43.332 7.239,43.332 ; 5.715,47.142 7.239,47.142 ; 5.715,50.927 7.239,50.927 ; 6.477,38.76 6.477,40.284 ; 6.477,42.57 6.477,44.094 ; 6.477,46.38 6.477,47.904 ; 6.477,50.165 6.477,51.689 ; 59.614,7.493 61.138,7.493 ; 60.376,6.731 60.376,8.255 ; 63.398,7.493 64.922,7.493 ; 64.16,6.731 64.16,8.255 ; 67.208,7.493 68.732,7.493 ; 67.97,6.731 67.97,8.255 ; 71.018,7.493 72.542,7.493 ; 71.78,6.731 71.78,8.255 ; 74.803,7.493 76.327,7.493 ; 75.108,46.431 76.632,46.431 ; 75.565,6.731 75.565,8.255 ; 75.87,45.669 75.87,47.193 ; 78.613,7.493 80.137,7.493 ; 79.375,6.731 79.375,8.255 ; 82.423,7.493 83.947,7.493 ; 83.185,6.731 83.185,8.255 ; 86.208,7.493 87.732,7.493 ; 86.97,6.731 86.97,8.255 ; 92.1,7.493 93.624,7.493 ; 92.862,6.731 92.862,8.255 ; 95.885,7.493 97.409,7.493 ; 96.647,6.731 96.647,8.255 ; 99.695,7.493 101.219,7.493 ; 100.457,6.731 100.457,8.255 ; 103.505,7.493 105.029,7.493 ; 104.267,6.731 104.267,8.255 ; 107.29,7.493 108.814,7.493 ; 108.052,6.731 108.052,8.255 ; 111.1,7.493 112.624,7.493 ; 111.862,6.731 111.862,8.255 ; 114.91,7.493 116.434,7.493 ; 115.672,6.731 115.672,8.255 ; 118.694,7.493 120.218,7.493 ; 119.456,6.731 119.456,8.255 ; 124.562,45.669 124.562,47.193 ; 125.603,7.493 127.127,7.493 ; 126.365,6.731 126.365,8.255 ; 128.372,45.669 128.372,47.193 ; 129.388,7.493 130.912,7.493 ; 130.15,6.731 130.15,8.255 ; 132.182,45.669 132.182,47.193 ; 133.198,7.493 134.722,7.493 ; 133.96,6.731 133.96,8.255 ; 135.966,45.669 135.966,47.193 ; 137.008,7.493 138.532,7.493 ; 137.77,6.731 137.77,8.255 ; 140.792,7.493 142.316,7.493 ; 194.497,25.425 199.425,25.425 ; 196.682,25.414 197.24,25.414 ; 196.961,22.962 196.961,27.889 ; 196.961,25.044 196.961,25.781
  lines w0.254: -2.508,1.524 -2,0 ; -2.508,51.816 -2,53.34 ; -2.254,0 -1.746,0 ; -2.254,53.34 -1.746,53.34 ; -2,19.984 -2,0 ; -2,33.356 -2,53.34 ; -1.492,1.524 -2,0 ; -1.492,51.816 -2,53.34 ; 0,-2.254 0,-1.746 ; 1.524,-2.508 0,-2 ; 1.524,-1.492 0,-2 ; 90.217,-2 0,-2 ; 105.744,-2 195.961,-2 ; 194.437,-2.508 195.961,-2 ; 194.437,-1.492 195.961,-2 ; 195.961,-2.254 195.961,-1.746
  text "53.34 (mm)" at -0.687,20.238 h1.52 r90
  text "3" at 194.91,1.229 h1
  text "195.961 (mm)" at 90.471,-3.313 h1.52
Bottom Overlay:
  text "ADC1" at 188.722,35.052 h1
  text "ADC2" at 188.976,32.512 h1
  text "DAC1" at 188.976,29.972 h1
  text "DAC2" at 188.722,27.432 h1

## Text inside footprints (layer, text, board x,y; h text height)
P1: Bottom Overlay "2" at 48.771,36.678 h1 r90; Bottom Overlay "1" at 51.311,36.17 h1 r90; Bottom Overlay "7" at 53.34,26.67 h1 r90; Bottom Overlay "8" at 46.736,26.924 h1 r90
P2: Bottom Overlay "2" at 46.736,24.13 h1 r90; Bottom Overlay "1" at 53.34,24.13 h1 r90; Bottom Overlay "9" at 51.308,12.192 h1 r90; Bottom Overlay "10" at 48.768,12.192 h1 r90
P3: Bottom Overlay "2" at 119.77,33.045 h1 r90; Bottom Overlay "1" at 122.31,32.537 h1 r90; Bottom Overlay "9" at 122.31,18.821 h1 r90; Bottom Overlay "10" at 119.77,18.821 h1 r90